# EAGLE board bt (EAGLE 5.11)
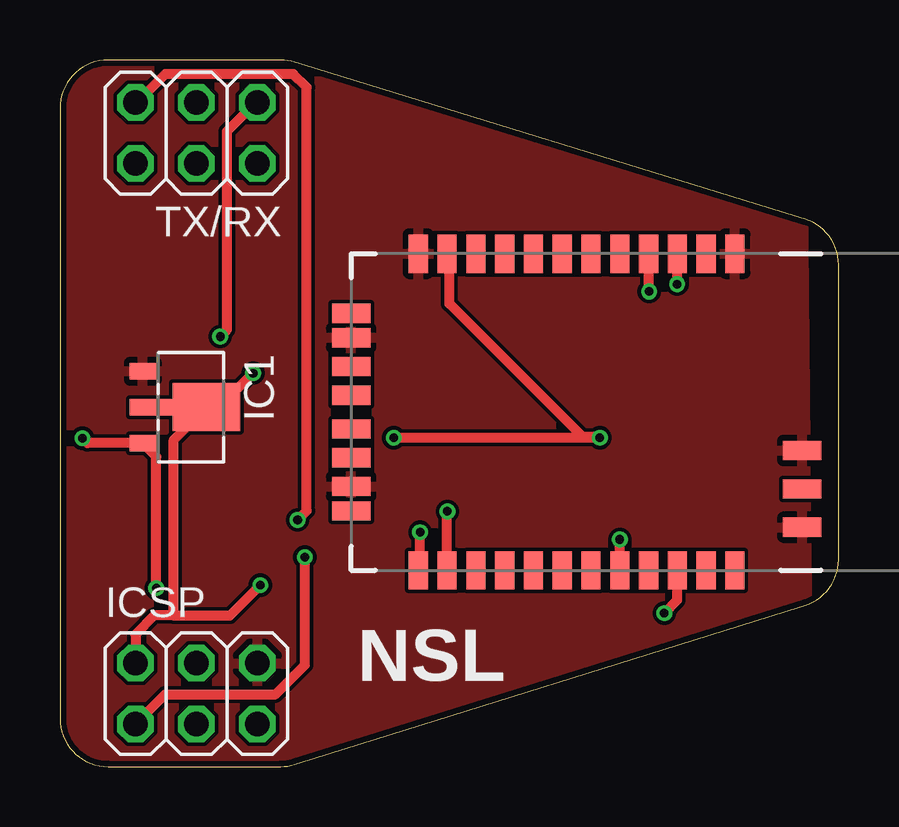
[diagram p0: board, top side]
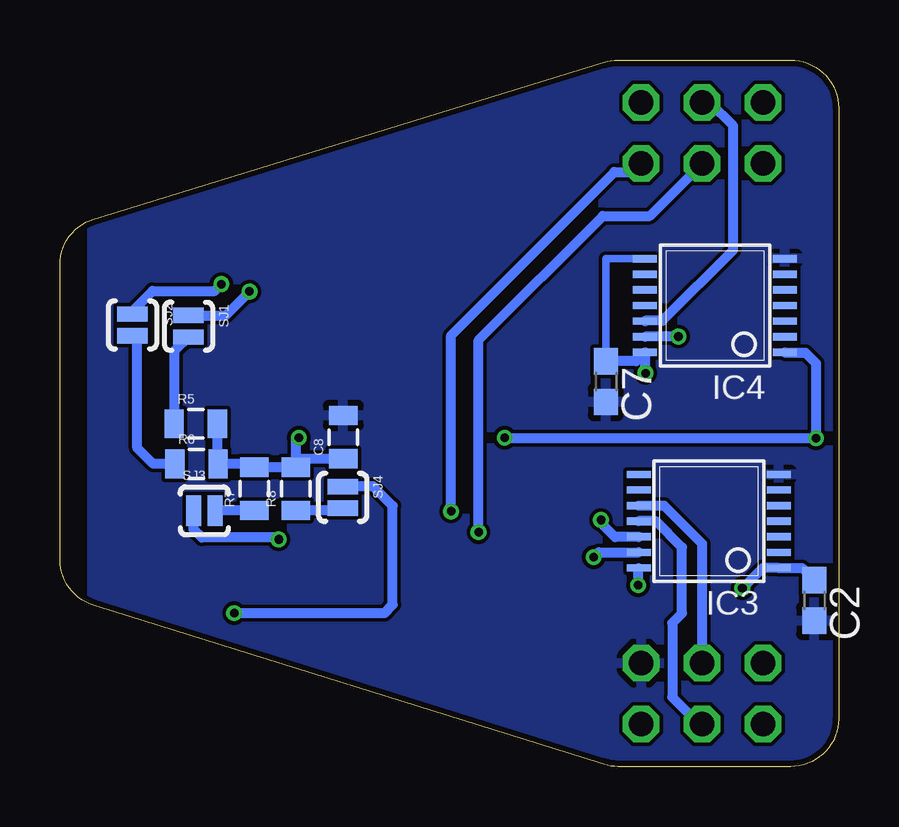
[diagram p1: board, bottom side, seen from below]

Size 32.46 x 29.46 mm. Coordinates in mm from the lower left corner, seen from the top.
Outline: 31.06,6.72 arc73 32.46,8.63 32.46,20.92 arc73 31.05,22.84 9.79,29.38 arc17 9.2,29.46 2,29.46 arc90 0,27.46 0,2 arc90 2,0 9.2,0 arc17 9.79,0.09 31.06,6.72
Copper layers (1*16): Top 0.035mm / dielectric 1.5mm / Bottom 0.035mm
Design rules "ITead_rule": minimum track width 6mil, minimum drill 12mil, track to track 6mil, track to pad 6mil, pad to pad 6mil, via to via 6mil, smd to smd 0mil, copper to edge 10mil, drill to drill 10mil, minimum pad ring 10mil, minimum via ring 6mil, stop-mask expansion 2mil, vias tented up to drill 100mil, thermal gap 10mil
Net classes: 1 power: width 0.203 mm

## Footprints (pad centres in the part's own frame; a part is rotated, then mirrored left to right if it is on the bottom)
C0603 = smd 1.1 x 1: 1 -0.85,0; 2 0.85,0
0805 = smd 0.8 x 1.2: 1 -0.9,0; 2 0.9,0
SOT89-3L = smd 0.7 x 1.1: 1 -1.5,-1.75; 3 1.5,-1.75 | smd 0.7 x 1.8: 2 0,-1.4 | smd 2 x 2.8: 4 0,0.9
TSSOP-14 = smd 0.305 x 0.991: 1 -1.95,-2.918; 2 -1.3,-2.918; 3 -0.65,-2.918; 4 0,-2.918; 5 0.65,-2.918; 6 1.3,-2.918; 7 1.95,-2.918; 8 1.95,2.918; 9 1.3,2.918; 10 0.65,2.918; 11 0,2.918; 12 -0.65,2.918; 13 -1.3,2.918; 14 -1.95,2.918
RN41 = smd 0.8 x 1.6: 1 -6.6,-6.6; 2 -5.4,-6.6; 3 -4.2,-6.6; 4 -3,-6.6; 5 -1.8,-6.6; 6 -0.6,-6.6; 7 0.6,-6.6; 8 1.8,-6.6; 9 3,-6.6; 10 4.2,-6.6; 11 5.4,-6.6; 12 6.6,-6.6; 13 6.6,6.6; 14 5.4,6.6; 15 4.2,6.6; 16 3,6.6; 17 1.8,6.6; 18 0.6,6.6; 19 -0.6,6.6; 20 -1.8,6.6; 21 -3,6.6; 22 -4.2,6.6; 23 -5.4,6.6; 24 -6.6,6.6 | smd 1.6 x 0.8: 25 -9.4,4.8; 26 -9.4,3.2; 27 -9.4,1.6; 28 9.4,3.1; 29 9.4,-3.1; 30 9.4,-4.122; 31 9.4,-1.9; 32 9.4,-0.7; 33 9.4,0.7; 34 9.4,1.9; 35 9.4,4.122
2X03 = drill 1.016 octagon: 1 -2.54,-1.27; 2 -2.54,1.27; 3 0,-1.27; 4 0,1.27; 5 2.54,-1.27; 6 2.54,1.27
SJ_2S-NO = smd 0.635 x 1.27: 1 -0.45,0; 2 0.45,0

## Placement (x,y rotation side)
C2  0.1uF  [C0603]  1.02,6.93 270 bottom
C7  0.1uF  [C0603]  9.7,16.05 270 bottom
C8  .1uF  [0805]  20.65,13.74 90 bottom
IC1  AP1115B  [SOT89-3L]  5.21,14.99 270 top
IC3  TXS0104EPWR  [TSSOP-14]  5.41,10.24 90 bottom
IC4  TXS0104EPWR  [TSSOP-14]  5.16,19.23 90 bottom
IC5  BLUETOOTH-RN41"  [RN41]  21.54,14.78 180 top
ICSP  ICSP  [2X03]  5.69,3.05 0 top
R5  1k  [0805]  26.8,14.3 0 bottom
R6  1k  [0805]  26.77,12.62 0 bottom
R7  1k  [0805]  24.36,11.58 90 bottom
R8  1k  [0805]  22.63,11.58 90 bottom
SJ1  SOLDERJUMPERNO  [SJ_2S-NO]  27.1,18.36 270 bottom
SJ2  SOLDERJUMPERNO  [SJ_2S-NO]  29.44,18.41 270 bottom
SJ3  SOLDERJUMPERNO  [SJ_2S-NO]  26.44,10.67 0 bottom
SJ4  SOLDERJUMPERNO  [SJ_2S-NO]  20.68,11.23 270 bottom
TX/RX  TX/RX  [2X03]  5.69,26.42 0 top

## Library data of the parts
C2 C7 = rcl
C8 R5-R8 SJ1-SJ4 = SparkFun
IC1 = wifi
IC3 IC4 = pcbqr_v3
IC5 = NSL_Mini_Quad
ICSP TX/RX = pinhead

## Nets
3V3 [power]: C2.1 C8.1 IC1.3 IC3.1 IC4.1 IC5.11 R5.2 R6.2 R7.2 R8.2
5V [power]: C7.1 IC1.2 IC1.4 IC3.14 IC4.8 IC4.14 ICSP.2
CS: IC3.12 TX/RX.2
GND: C2.2 C7.2 C8.2 IC1.1 IC3.7 IC4.7 IC5.1 IC5.12 IC5.25 IC5.27 IC5.28 IC5.29 ICSP.6
MISO: IC3.13 ICSP.1
MOSI: IC3.10 ICSP.4
N$1: TX/RX.1
N$5: R5.1 SJ1.2
N$21: R7.1 SJ3.2
N$23: R6.1 SJ2.2
N$24: R8.1 SJ4.2
N$117: IC3.8
PIO3: IC5.20 SJ3.1
PIO4: IC5.22 SJ4.1
PIO5: IC5.21
PIO6: IC5.3 SJ2.1
PIO7: IC5.4 SJ1.1
PWR_EN: IC4.3
RST: ICSP.5
RST1: IC5.5
RX: IC5.14 TX/RX.5
RX_3V3: IC4.4
RX_5V: IC4.11
SCK: IC3.11 ICSP.3
SPI_CLK: IC3.4
SPI_CS: IC3.3
SPI_DI: IC3.5
SPI_DO: IC3.2
SPI_IRQ: IC4.2
TX: IC5.13 TX/RX.3
TX_3V3: IC4.5
TX_5V: IC4.10
WIFI_EN: IC4.12 TX/RX.4
WIFI_IRQ: IC4.13 TX/RX.6

## Tracks (layer width: path | path; a pad name or v marks a point on that pad's centre or on a via)
3V3  (via drill 0.36)
  Top 0.406: IC5.11 16.23,21.29 16.23,19.3 21.79,13.74 | 21.79,13.74 21.82,13.72 v22.5,13.72 | v4.01,7.44 4.01,12.93 IC1.3 1.14,13.49 v0.94,13.69 | 21.79,13.74 22.48,13.74 22.45,13.72 v13.92,13.72
  Bottom 0.406: v22.5,13.72 22.63,13.59 R8.2 | R8.2 R7.2 24.5,12.62 R6.2 25.9,12.65 R5.2 | C8.1 22.63,12.84 R8.2 | C2.1 1.52,8.29 IC3.1 3.17,8.29 v4.01,7.44 | IC4.1 2.21,17.25 1.37,17.25 0.94,16.81 v0.94,13.69 13.89,13.69 v13.92,13.72
5V  (via drill 0.36)
  Top 0.406: v8.36,7.57 7.09,6.3 4.75,6.3 | 4.75,6.3 3.94,6.3 3.15,5.51 ICSP.2 | IC1.4 IC1.2 | IC1.4 4.75,13.63 4.75,6.3 | IC1.4 6.63,14.99 v8.05,16.41
  Bottom 0.305: IC4.8 9.7,21.18 C7.1
  Bottom 0.406: IC3.14 8.36,8.26 v8.36,7.57 | C7.1 8.45,16.9 IC4.14 8.05,17.26 v8.05,16.41
CS  (via drill 0.36)
  Top 0.406: v9.91,10.29 10.29,10.67 10.29,28.32 9.73,28.88 4.39,28.88 3.2,27.69 TX/RX.2
  Bottom 0.406: IC3.12 9.32,9.58 9.91,10.16 v9.91,10.29
GND
  pour Top: 30.91,30.33 31.22,-1.45 -3.71,-1.6 -3.99,28.16 arc-90 -2,30.18
  pour Bottom: -4.06,30.81 31.14,30.63 31.14,-1.24 -4.06,-1.07
MISO  (via drill 0.36)
  Top 0.406: ICSP.1 4.37,3 8.97,3 10.21,4.24 v10.21,8.74
  Bottom 0.406: v10.21,8.74 10.01,8.94 IC3.13
MOSI
  Bottom 0.406: IC3.10 8.33,10.87 7.26,10.87 5.69,9.3 ICSP.4
N$5
  Bottom 0.406: SJ1.2 27.7,17.32 R5.1
N$21
  Bottom 0.406: R7.1 SJ3.2
N$23
  Bottom 0.406: SJ2.2 29.24,17.76 29.24,13.28 28.57,12.62 R6.1
N$24
  Bottom 0.406: SJ4.2 20.77,10.68 R8.1
PIO3  (via drill 0.36)
  Top 0.406: IC5.20 v23.34,9.47
  Bottom 0.406: v23.34,9.47 23.42,9.55 26.54,9.55 26.89,9.9 SJ3.1
PIO4  (via drill 0.36)
  Top 0.406: v25.2,6.4 25.74,6.94 IC5.22
  Bottom 0.406: SJ4.1 19.41,11.68 18.59,10.87 18.59,6.76 18.95,6.4 v25.2,6.4
PIO6  (via drill 0.36)
  Top 0.406: IC5.3 v25.73,20.12
  Bottom 0.406: v25.73,20.12 26.01,19.84 28.6,19.84 29.44,19 SJ2.1
PIO7  (via drill 0.36)
  Top 0.406: IC5.4 24.56,21.36 v24.56,19.81
  Bottom 0.406: v24.56,19.81 25.56,18.81 SJ1.1
RX  (via drill 0.36)
  Top 0.406: v16.15,10.64 16.14,10.63 IC5.14
  Bottom 0.406: v16.15,10.64 16.15,17.98 9.35,24.79 8.59,24.79 TX/RX.5
SCK
  Bottom 0.406: IC3.11 7.62,10.24 6.53,9.14 6.53,6.4 6.93,5.99 6.93,2.9 5.82,1.78 ICSP.3
TX  (via drill 0.36)
  Top 0.406: IC5.13 15.01,8.18 v15.01,9.78
  Bottom 0.406: v15.01,9.78 15.01,17.78 9.83,22.96 7.87,22.96 TX/RX.3
WIFI_EN
  Bottom 0.406: IC4.12 8.06,18.59 7.34,18.59 4.39,21.54 4.39,26.72 5.36,27.69 TX/RX.4
WIFI_IRQ  (via drill 0.36)
  Top 0.406: v6.68,17.93 6.96,18.21 6.96,26.49 8.15,27.69 TX/RX.6
  Bottom 0.406: IC4.13 v6.68,17.93

## Text on the board
tPlace: NSL